# Altium PCB Modulo_Adaptador.PcbDoc
Units mm, origin at the board's own origin, x right, y up, seen from the top; angles counter-clockwise.
Board outline 30 x 22.57 mm, 2 copper layers (Top Layer, Bottom Layer); 2 components, 10 nets, 20 pads, 0 vias.
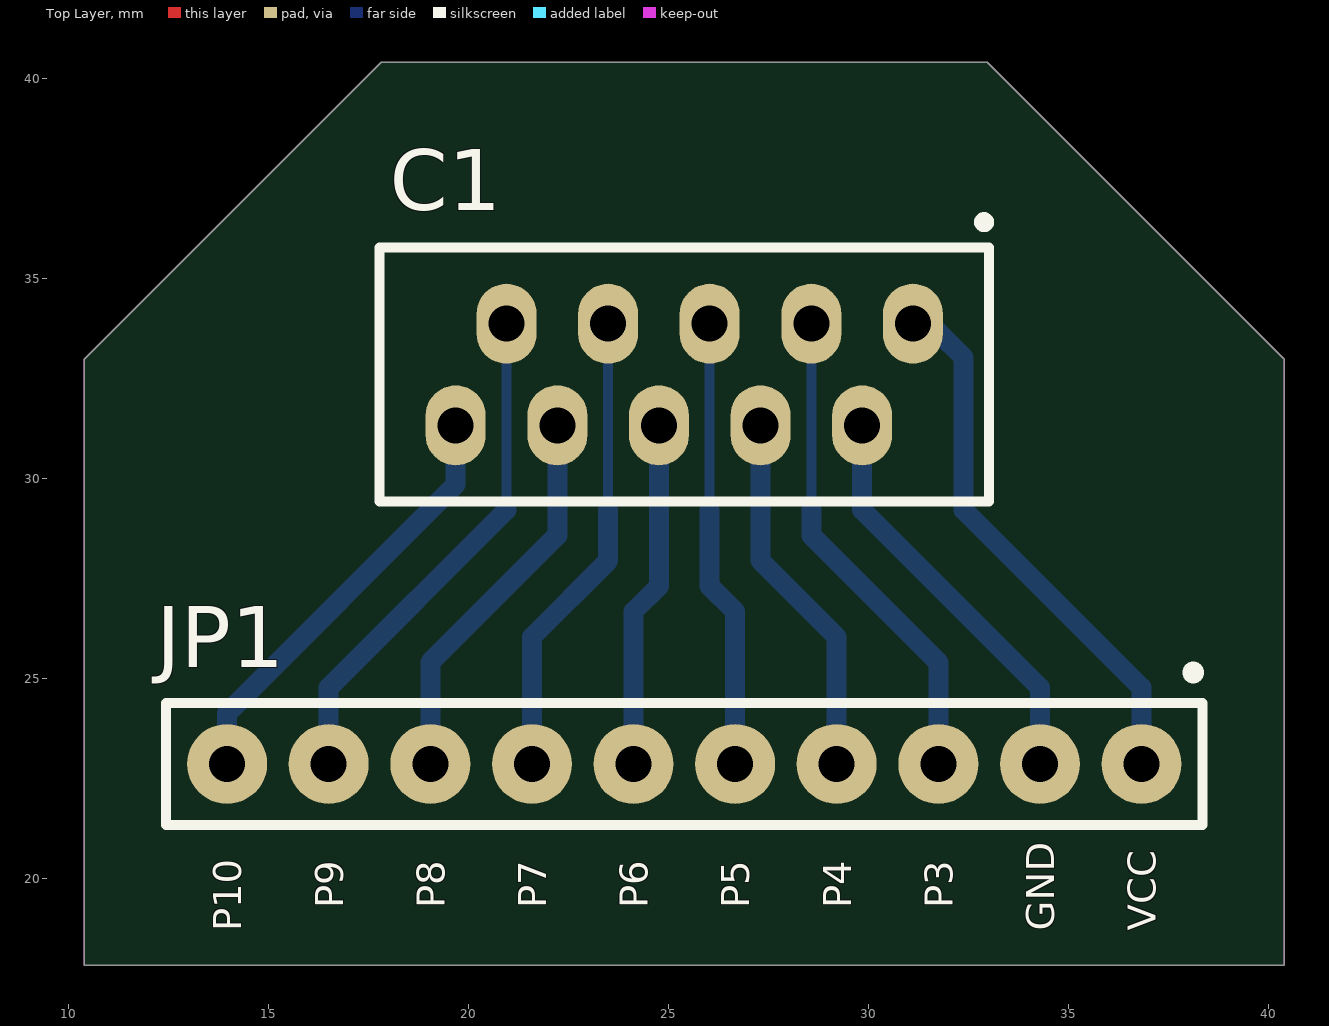
[diagram p0: Top Layer view]
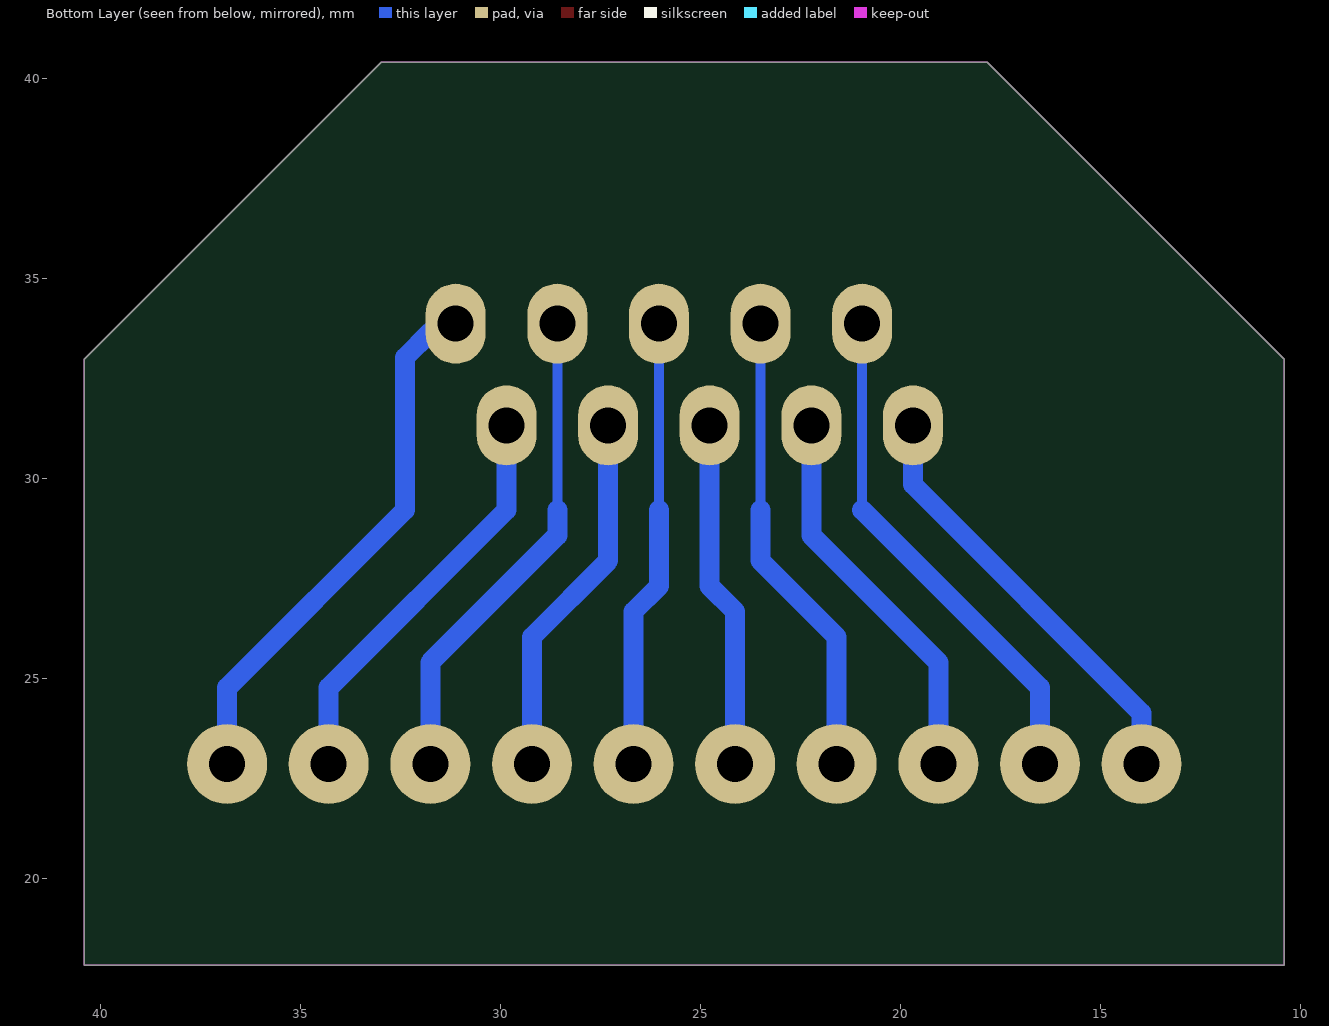
[diagram p1: Bottom Layer view, seen from below]

## Layer stack, top to bottom
Top Solder: solder mask 0.0102, Solder Resist, Dk 3.5
Top Layer: signal copper 0.0356
Dielectric 1: dielectric 0.32, FR-4, Dk 4.8
Bottom Layer: signal copper 0.0356
Bottom Solder: solder mask 0.0102, Solder Resist, Dk 3.5

## Board outline
10.4,17.826 40.4,17.826 40.4,32.974 32.974,40.4 17.826,40.4 10.4,32.974

## Design rules (kind name [scope] priority, off if disabled: settings)
Clearance [All] p1: gap=0.254 ignorepadtopadclearanceinfootprint=FALSE except(0: Arc-Hole Track-Hole SMDPad-Hole THPad-Hole Via-Hole Fill-Hole Poly-Hole Region-Hole Text-Hole)
PolygonConnect [All] p1: connectstyle=Relief reliefconductorwidth=0.254 reliefentries=4 polygonreliefangle="90 Angle" airgapwidth=0.254
RoutingVias [All] p1: holewidth=0.711 width=1.27 viastyle="Through Hole" minholewidth=0.711 minwidth=1.27 maxholewidth=0.711 maxwidth=1.27
SolderMaskExpansion [All] p1: expansion=0.102 istentingtop=FALSE
Width [All] p1: maxlimit=1 minlimit=0.25 preferedwidth=0.5 minimp=50.000000 maximp=50.000000 favimp=50.000000
30 further rules are at their usual default settings.

## Components (designator, comment, footprint, x,y, rotation, side; value= is the part's Value field where it differs from the comment)
C1 "Micro-MaTchF" "MICRO-MATCH FAMALE 1.27MM/ HOLE" 33.655,33.864 r180 top
JP1 "Pines (10X2.54)" PIN(10X2.54MM) 36.83,22.86 r180 top

## Footprints (in the part's own frame and the unit in brackets; to place one, negate y for a bottom-side part, rotate by r counter-clockwise, add the part's x,y. Pads: shape width x height; smd on the part's side, far side on the other; paste and mask are expansions set on the pad)
"MICRO-MATCH FAMALE 1.27MM/ HOLE" [mm] "TE Connection"
  oval 1.5x2 hole 0.9 mask+0.2: 1(2.54,0) 2(3.81,2.54) 3(5.08,0) 4(6.35,2.54) 5(7.62,0) 6(8.89,2.54) 7(10.16,0) 8(11.43,2.54) 9(12.7,0) 10(13.97,2.54)
  silkscreen extent 0.63,-2.66 15.88,4.44, body extent 0.99,-1.26 15.62,3.74, height 4
PIN(10X2.54MM) [mm] "Tira de Pines Macho"
  round 2 hole 0.9 mask+0.2: 1(0,0) 2(2.54,0) 3(5.08,0) 4(7.62,0) 5(10.16,0) 6(12.7,0) 7(15.24,0) 8(17.78,0) 9(20.32,0) 10(22.86,0)
  silkscreen extent -1.52,-2.31 24.38,1.52, body extent -1.14,-1.25 24.31,1.25, height 2.6

## Part data
C1: "Micro-MaTch Famale 1.27mm T/Hole"

## Nets (pads, with @x,y where several pads share a name; then routed paths per layer and width w, separated by ;. In a path a pad name is that pad's centre, name@x,y a point inside that pad or via, vN(x,y) a via of type N, cw(c..) or ccw(c..) an arc to the next point about the centre after c; other vN are vias at no path point)
NetC1_1: C1.1 JP1.1 | length 13.6
  Bottom Layer w0.5: C1.1 31.324,33.655 31.75,33.655 32.385,33.02 32.385,29.21 36.83,24.765 JP1.1
NetC1_2: C1.2 JP1.2 | length 10.3
  Bottom Layer w0.5: C1.2 29.845,29.21 34.29,24.765 JP1.2
NetC1_3: C1.3 JP1.3 | length 12.3
  Bottom Layer w0.25: 28.575,29.21 C1.3
  Bottom Layer w0.5: 28.575,29.21 28.575,28.575 31.75,25.4 JP1.3
NetC1_4: C1.4 JP1.4 | length 9.3
  Bottom Layer w0.5: C1.4 27.305,27.94 29.21,26.035 JP1.4
NetC1_5: C1.5 JP1.5 | length 11.3
  Bottom Layer w0.25: 26.035,29.21 C1.5
  Bottom Layer w0.5: 26.035,29.21 26.035,27.305 26.67,26.67 JP1.5
NetC1_6: C1.6 JP1.6 | length 8.7
  Bottom Layer w0.5: JP1.6 24.13,26.67 24.765,27.305 C1.6
NetC1_7: C1.7 JP1.7 | length 11.8
  Bottom Layer w0.25: 23.495,29.21 C1.7
  Bottom Layer w0.5: JP1.7 21.59,26.035 23.495,27.94 23.495,29.21
NetC1_8: C1.8 JP1.8 | length 9.8
  Bottom Layer w0.5: JP1.8 19.05,25.4 22.225,28.575 C1.8
NetC1_9: C1.9 JP1.9 | length 12.8
  Bottom Layer w0.25: 20.955,29.21 C1.9
  Bottom Layer w0.5: JP1.9 16.51,24.765 20.955,29.21
NetC1_10: C1.10 JP1.10 | length 10.9
  Bottom Layer w0.5: JP1.10 13.97,24.13 19.685,29.845 19.685,31.07 19.558,31.197 C1.10

## Keep-outs
Keep-Out Layer:
  the board outline again, w0.013

## Silkscreen, mask and mechanical layers (free items; w line width, h text height)
Top Overlay:
  text "P9" at 16.868,19.258 h0.7 r90
  text "P8" at 19.408,19.258 h0.7 r90
  text "P7" at 21.948,19.258 h0.7 r90
  text "P6" at 24.488,19.258 h0.7 r90
  text "P5" at 27.028,19.258 h0.7 r90
  text "P4" at 29.568,19.258 h0.7 r90
  text "P3" at 32.108,19.258 h0.7 r90
  text "GND" at 34.648,18.692 h0.7 r90
  text "VCC" at 37.188,18.692 h0.7 r90
  text "P10" at 14.328,18.675 h0.7 r90
Autocad:
  lines w0.013: 12.4,25.4 25.4,25.4 25.4,28.448 ; 10.4,17.826 17.826,10.4 ; 10.4,17.826 10.4,32.974 ; 10.4,17.826 17.826,10.4 ; 10.4,17.826 10.4,32.974 ; 10.4,32.974 40.4,32.974 ; 10.4,32.974 17.826,40.4 ; 10.4,32.974 17.826,40.4 ; 17.826,10.4 32.974,10.4 ; 17.826,10.4 32.974,10.4 ; 17.826,40.4 32.974,40.4 ; 17.826,40.4 32.974,40.4 ; 32.974,10.4 40.4,17.826 ; 32.974,10.4 40.4,17.826 ; 32.974,40.4 40.4,32.974 ; 32.974,40.4 40.4,32.974 ; 40.4,17.826 40.4,32.974 ; 40.4,17.826 40.4,32.974 ; 8.4,16.9 12.4,16.9 12.4,33.9 8.4,33.9 8.4,16.9 ; 12.4,18.654 18.654,12.4 32.146,12.4 38.4,18.654 38.4,32.146 32.146,38.4 18.654,38.4 12.4,32.146 12.4,18.654 ; 13.4,19.068 13.4,31.732 19.068,37.4 31.732,37.4 37.4,31.732 37.4,19.068 31.732,13.4 19.068,13.4 13.4,19.068 ; 38.4,16.9 42.4,16.9 42.4,33.9 38.4,33.9 38.4,16.9